# Altium PCB PCB_CAN2USB.PcbDoc
Units mm, origin at the board's own origin, x right, y up, seen from the top; angles counter-clockwise.
Board outline 25.4 x 99.06 mm, 2 copper layers (Top Layer, Bottom Layer); 26 components, 23 nets, 113 pads, 13 vias.
Unrouted connection lines stored in the file: 1.
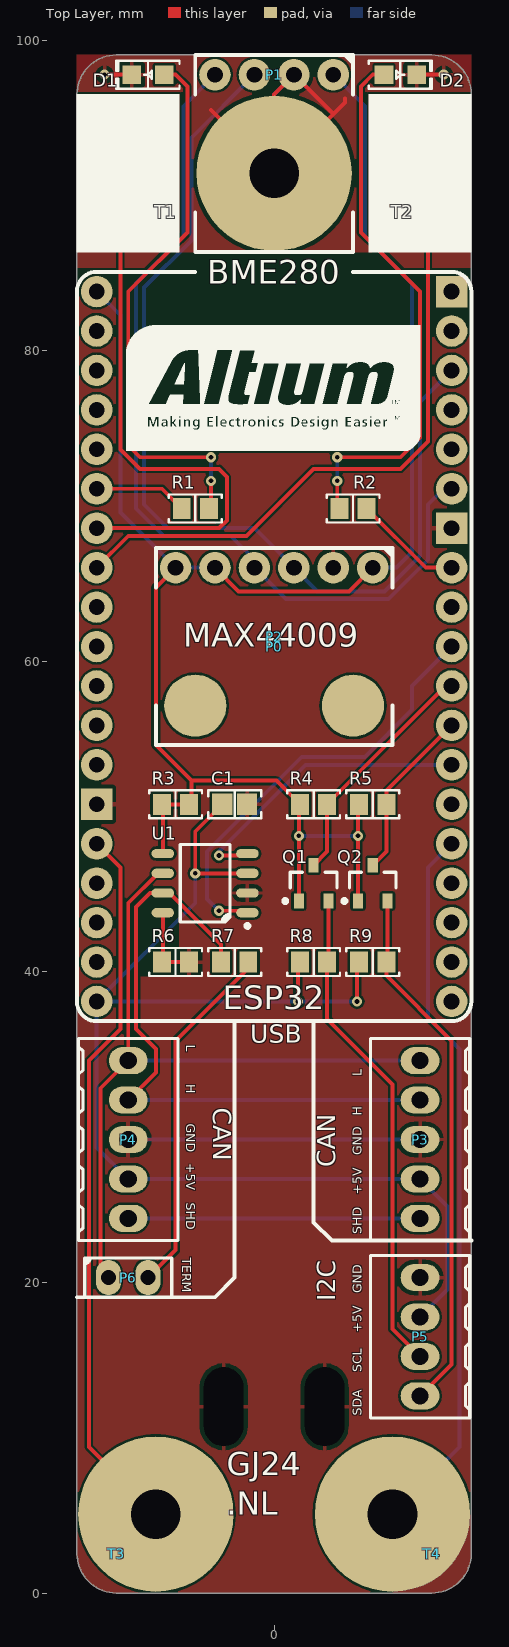
[diagram p0: Top Layer view]
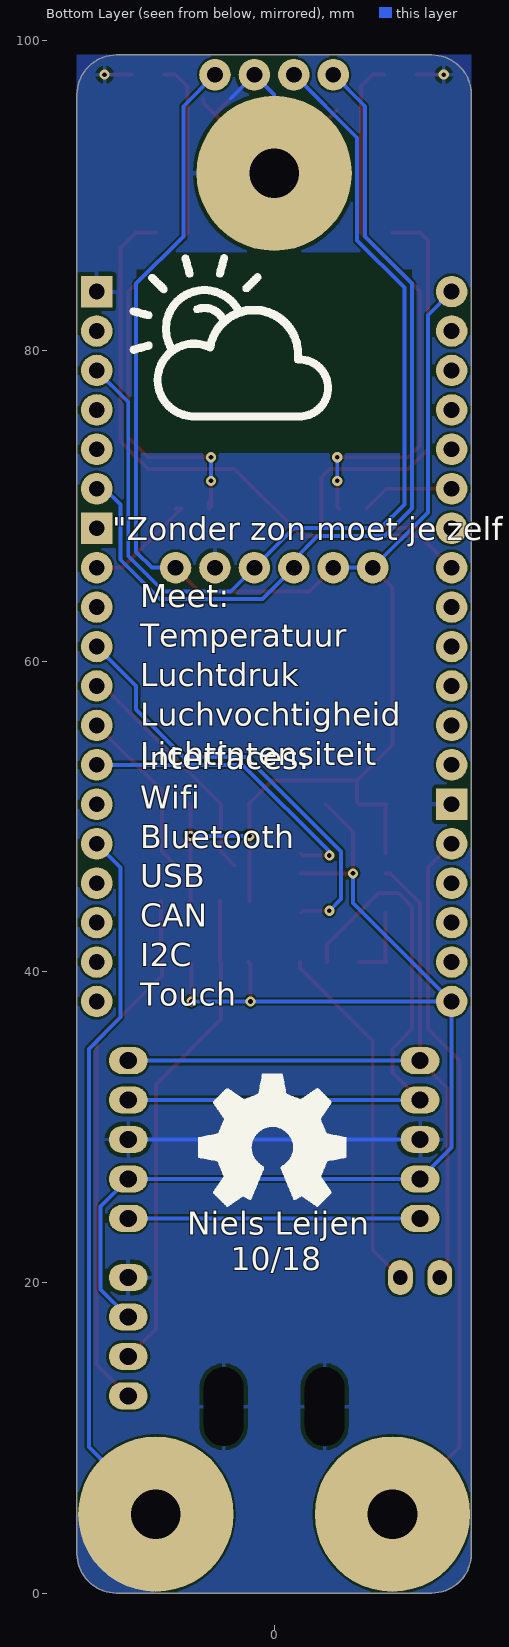
[diagram p1: Bottom Layer view, seen from below]
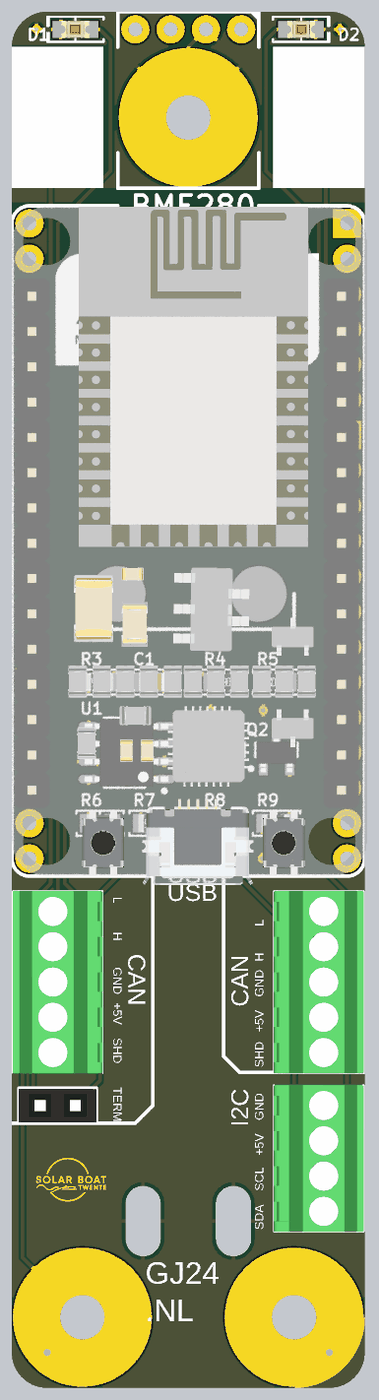
[diagram p2: 3D render of the assembled board from above, using the file's embedded part models]

## Layer stack, top to bottom
Top Solder: solder mask 0.0102, Solder Resist, Dk 3.5
Top Layer: signal copper 0.0356
Dielectric 1: dielectric 0.32, FR-4, Dk 4.8
Bottom Layer: signal copper 0.0356
Bottom Solder: solder mask 0.0102, Solder Resist, Dk 3.5

## Board outline
-12.7,2.54 -12.7,96.52 cw(c-10.16,96.52) -10.16,99.06 10.16,99.06 cw(c10.16,96.52) 12.7,96.52 12.7,2.54 cw(c10.16,2.54) 10.16,0 -10.16,0 cw(c-10.16,2.54)

## Design rules (kind name [scope] priority, off if disabled: settings)
Clearance [All] p1: gap=0.152 ignorepadtopadclearanceinfootprint=FALSE
PolygonConnect PolygonConnect_NOGND [not InNet('CAN_GND')] p1: connectstyle=Direct reliefconductorwidth=0.254 reliefentries=4 polygonreliefangle="90 Angle" airgapwidth=0.254
PolygonConnect [All] p2: connectstyle=Relief reliefconductorwidth=0.254 reliefentries=4 polygonreliefangle="90 Angle" airgapwidth=0.254
RoomDefinition Schematic_CAN2USB [InComponentClass('Schematic_CAN2USB')] p1: confinementstyle=ConfineIn formatcopy=TRUE lockcomponents=FALSE outline -18.75,-10.5 18.5,-10.5 18.5,107.5 -18.75,107.5
RoutingVias [All] p1: holewidth=0.711 width=1.27 viastyle="Through Hole" minholewidth=0.3 minwidth=0.6 maxholewidth=0.3 maxwidth=0.65
SolderMaskExpansion [All] p1: expansion=0.102
UnRoutedNet [All] p1: checkbadconnections=TRUE
Width [All] p1: maxlimit=0.254 minlimit=0.254 preferedwidth=0.254
29 further rules are at their usual default settings.

## Components (designator, comment, footprint, x,y, rotation, side; value= is the part's Value field where it differs from the comment)
C1 "Cap" "CAP 0805/2012" -2.54,50.8 r0 top value=100nF
D1 "Green" "LED 0805/2012 RED" -8.128,97.79 r180 top
D2 "Green" "LED 0805/2012 RED" 8.128,97.79 r0 top
P0 "NodeMCU_ESP32" NodeMCU 0,60.96 r0 top locked (schematic designator U1)
P1 "MAX44009" MAX44009_Breakout 0,99.06 r180 top (schematic designator P6)
P2 "BME280" BME280_Breakout 2.54,67.31 r180 top (schematic designator P5)
P3 "CAN2" "TE 282834-5" 9.398,29.21 r270 top (schematic designator P4)
P4 "CAN1" "TE 282834-5" -9.398,29.21 r90 top (schematic designator P3)
P5 "I2C" "TE 282834-4" 9.398,16.51 r270 top (schematic designator P1)
P6 "CAN Terminate" "SAMTEC SSW-102-03-T-S" -9.398,20.32 r0 top (schematic designator P2)
Q1 "BSS138" "DIODES SOT-23-3" 2.54,45.72 r90 top
Q2 "BSS138" "DIODES SOT-23-3" 6.35,45.72 r90 top
R1 "Res2" "RES 0805/2012" -5.08,69.85 r180 top value=220 (schematic designator R8)
R2 "Res2" "RES 0805/2012" 5.08,69.85 r0 top value=220 (schematic designator R9)
R3 "Res2" "RES 0805/2012" -6.35,50.8 r180 top value=0 (schematic designator R6)
R4 "Res2" "RES 0805/2012" 2.54,50.8 r180 top value=10K (schematic designator R1)
R5 "Res2" "RES 0805/2012" 6.35,50.8 r180 top value=10K (schematic designator R3)
R6 "Res2" "RES 0805/2012" -6.35,40.64 r0 top value=10K (schematic designator R5)
R7 "Res2" "RES 0805/2012" -2.54,40.64 r180 top value=120
R8 "Res2" "RES 0805/2012" 2.54,40.64 r180 top value=10K (schematic designator R2)
R9 "Res2" "RES 0805/2012" 6.35,40.64 r180 top value=10K (schematic designator R4)
T1 "Touch" Pad -7.62,87.63 r0 top (schematic designator T2)
T2 "Touch" Pad 7.62,87.63 r0 top (schematic designator T1)
T3 "Touch" Pad -10.16,2.54 r0 top
T4 "Touch" Pad 10.16,2.54 r0 top
U1 "CAN Tranceiver 5V/3.3V" "MICROCHIP SOIC-8 150mil Wide" -4.445,45.72 r180 top (schematic designator U2)

## Footprints (in the part's own frame and the unit in brackets; to place one, negate y for a bottom-side part, rotate by r counter-clockwise, add the part's x,y. Pads: shape width x height; smd on the part's side, far side on the other; paste and mask are expansions set on the pad)
BME280_Breakout [mil] "Bosch BME280 digital pressure sensor, humidity sensor, and temperature sensor"
  round 80 hole 40: 1(-150,50) 2(-50,50) 3(50,50) 4(150,50) 5(250,50) 6(350,50)
  round 157.48 smd: MH(-100,400) MH(300,400)
  silkscreen extent -200,0 400,500, body extent -200,0 400,500, height 79
"CAP 0805/2012" [mm] "Chip Capacitor, 2-Leads, Body 2.00x1.20mm, IPC Medium Density"
  rect 1.3x1.4 smd: 1(-0.8,0) 2(0.8,0)
  silkscreen extent -1.7,-0.9 1.7,0.9, body extent -1,-0.64 1,0.64, height 1.26
"DIODES SOT-23-3" [mm] "SOT23, 3-Leads, Body 2.90x2.40mm, Pitch 0.95mm, IPC Medium Density"
  rect 0.95x0.65 smd: 1(-1.15,0.95) 2(1.15,0) 3(-1.15,-0.95)
  silkscreen extent -1.27,-1.5 0.7,1.95, body extent -1.41,-1.45 1.41,1.45, height 1.5
"LED 0805/2012 RED" [mm] "Chip Diode, 2-Leads, Body 2.00x1.25mm, IPC Medium Density"
  rect 1.2x1.2 smd: 1(-1.05,0) 2(1.05,0)
  silkscreen extent -2.03,-0.9 2.03,0.9, body extent -1,-0.62 1,0.63, height 0.9
MAX44009_Breakout [mil]
  round 80 hole 40: 1(-150,50) 2(-50,50) 3(50,50) 4(150,50)
  silkscreen extent -200,0 200,500, body extent -200,0 200,500, height 79
"MICROCHIP SOIC-8 150mil Wide" [mm] "SOIC, 8-Leads, Body 4.90x3.90mm, Pitch 1.27mm, IPC Medium Density"
  oval 1.45x0.6 smd: 1(-2.725,1.905) 2(-2.725,0.635) 3(-2.725,-0.635) 4(-2.725,-1.905) 5(2.725,-1.905) 6(2.725,-0.635) 7(2.725,0.635) 8(2.725,1.905)
  silkscreen extent -2.85,-2.5 1.6,2.88, body extent -3.01,-2.45 3.01,2.45, height 1.5
NodeMCU [mil]
  round 80 hole 40: 1(-450,900) 2(-450,800) 3(-450,700) 4(-450,600) 5(-450,500) 6(-450,400) 7(-450,300) 8(-450,200) 9(-450,100) 10(-450,0) 11(-450,-100) 12(-450,-200) 13(-450,-300) 15(-450,-500) 16(-450,-600) 17(-450,-700) 18(-450,-800) 19(-450,-900) 20(450,-900) 21(450,-800) 22(450,-700) 23(450,-600) 24(450,-500) 25(450,-400) 26(450,-300) 27(450,-200) 28(450,-100) 29(450,0) 30(450,100) 31(450,200) 33(450,400) 34(450,500) 35(450,600) 36(450,700) 37(450,800)
  rect 80x80 hole 40: 14(-450,-400) 32(450,300) 38(450,900)
  silkscreen extent -500,-950 500,950, body extent -500,-975 506,947, height 311
Pad [mm]
  round 0.5 smd paste+0 mask+0: 1(0,0)
"RES 0805/2012" [mm] "Chip Resistor, 2-Leads, Body 2.00x1.25mm, IPC Medium Density"
  rect 1.15x1.35 smd: 1(-0.875,0) 2(0.875,0)
  silkscreen extent -1.7,-0.9 1.7,0.9, body extent -0.95,-0.62 1.05,0.63, height 0.6
"SAMTEC SSW-102-03-T-S" [mm]
  oval 1.6x2.25 hole 0.95: 1(-1.27,0) 2(1.27,0)
  silkscreen extent -2.8,-1.27 2.8,1.27, body extent -2.79,-1.21 2.79,1.21, height 8.51
"TE 282834-4" [mm]
  oval 1.75x2.5 hole 1.1: 1(-3.81,0) 2(-1.27,0) 3(1.27,0) 4(3.81,0)
  silkscreen extent -5.24,-3.2 5.24,3.2, body extent -5.31,-3.25 5.31,3.25, height 10
"TE 282834-5" [mm]
  oval 1.75x2.5 hole 1.1: 1(-5.08,0) 2(-2.54,0) 3(0,0) 4(2.54,0) 5(5.08,0)
  silkscreen extent -6.51,-3.2 6.51,3.2, body extent -6.58,-3.25 6.58,3.25, height 10

## Part data
C1: "Capacitor", LatestRevisionDate=17-Jul-2002, LatestRevisionNote="Re-released for DXP Platform.", PackageDescription="Radial Cap, Thru-Hole; 2 Leads; 0.3 in Pin Spacing", PackageReference=RAD-0.3, Published=8-Jun-2000, Publisher="Altium Limited"
D1 D2: library part LED, "Chip LED"
P1 P5: library part "Header 4", "Header, 4-Pin", LatestRevisionDate=17-Jul-2002, LatestRevisionNote="Re-released for DXP Platform.", Publisher="Altium Limited"
P2: library part "Header 6", "Header, 6-Pin", LatestRevisionDate=17-Jul-2002, LatestRevisionNote="Re-released for DXP Platform.", Publisher="Altium Limited"
P3 P4: library part "Header 5", "Header, 5-Pin", LatestRevisionDate=17-Jul-2002, LatestRevisionNote="Re-released for DXP Platform.", Publisher="Altium Limited"
P6: library part "Header 2", "Header, 2-Pin", LatestRevisionDate=17-Jul-2002, LatestRevisionNote="Re-released for DXP Platform.", Publisher="Altium Limited"
Q1 Q2: library part MOSFET-N, "N-Channel MOSFET", LatestRevisionDate=17-Jul-2002, LatestRevisionNote="Re-released for DXP Platform.", PackageDescription="TO, Flat Index; 3 In-Line, Axial Leads; Body Dia. 4.6mm; Lead Dia. 0.5 mm (max)", PackageReference=E3, PackageVersion=1995/1996, Published=8-Jun-2000, Publisher="Altium Limited"
R1 R2 R3 R4 R5 R6 R7 R8 R9: "Resistor", LatestRevisionDate=17-Jul-2002, LatestRevisionNote="Re-released for DXP Platform.", PackageDescription="Axial Device, Thru-Hole; 2 Leads; 0.4 in Pin Spacing", PackageReference=AXIAL-0.4, Published=8-Jun-2000, Publisher="Altium Limited"
T1 T2 T3 T4: library part Socket, "Socket", LatestRevisionDate=17-Jul-2002, LatestRevisionNote="Re-released for DXP Platform.", Publisher="Altium Limited"
U1: library part TLE6250G(V33)

## Free pads (board coordinates)
  round 10 hole 3.2: MH(-7.62,5.08) MH(0,91.44) MH(7.62,5.08)
  round 0 hole 2.54 slot 5.08 at 90 deg unplated: ""(-3.25,12) ""(3.25,12)

## Via types
v1: diameter 0.65, hole 0.3, Top Layer to Bottom Layer, 13 vias

## Nets (pads, with @x,y where several pads share a name; then routed paths per layer and width w, separated by ;. In a path a pad name is that pad's centre, name@x,y a point inside that pad or via, vN(x,y) a via of type N, cw(c..) or ccw(c..) an arc to the next point about the centre after c; other vN are vias at no path point)
+3V3: P0.1 P1.1 P2.1 P2.5 P2.6 Q1.1 Q2.1 R3.1 R3.2 R4.2 R5.2 U1.5 | length 115.3
  Top Layer w0.254: U1.5 -7.17,50.745 R3.2 R3.1 -5.334,50.941 -5.334,52.324 ; P2.6 -7.62,64.77 -7.62,54.61 -5.334,52.324 ; P2.5 -2.286,64.516 4.826,64.516 P2.1 ; Q1.1 v1(1.59,48.768) 1.59,50.725 R4.2 0.141,52.324 -5.334,52.324 ; Q2.1 v1(5.4,48.768) 5.4,50.725 R5.2
  Bottom Layer w0.254: P0.1 -9.906,82.296 -9.906,69.596 P2.6 P2.5 ; v1(1.59,48.768) v1(5.4,48.768) ; P1.1 5.842,95.758 5.842,87.376 8.89,84.328 8.89,67.056 7.874,66.04 P2.1
CAN_GND: C1.2 D1.2 D2.2 P0.14 P0.32 P0.38 P1.2 P2.2 P3.3 P4.3 P5.1 pad. pad.MH@0,91.44 R6.1 R6.2 U1.2 U1.8 | length 55
  Top Layer w0.254: v1(-10.922,97.79) D1.2 ; U1.8 -7.17,40.695 R6.1 R6.2 ; -4.064,95.504 0,91.44 4.572,96.012 4.572,96.266 ; pad.MH@0,95.504 0,96.52 P1.2 3.683,95.377 ; D2.2 v1(10.922,97.79)
  Bottom Layer w0.254: P4.3 P3.3 ; pad.MH@0,91.44 0,96.52 P1.2 2.794,96.266
CAN_H: P3.2 P4.4 R7.2 U1.7 | length 40.9
  Top Layer w0.254: P4.4 -7.62,33.528 -7.62,35.052 -8.89,36.322 -8.89,44.196 -8.001,45.085 U1.7 -6.731,45.085 -3.415,41.769 R7.2
  Bottom Layer w0.254: P4.4 P3.2
CAN_L: P3.1 P4.5 P6.1 U1.6 | length 46.9
  Top Layer w0.254: P6.1 -11.176,20.828 -11.176,32.512 P4.5 -9.398,44.45 -7.493,46.355 U1.6
  Bottom Layer w0.254: P4.5 P3.1
CAN_RXD: P0.26 U1.4 | length 19.4
  Top Layer w0.254: v1(-3.556,47.498) -1.847,47.498 U1.4
  Bottom Layer w0.254: v1(-3.556,47.498) -3.556,47.752 2.032,53.34 P0.26
CAN_SHLD: P3.5 P4.1 | length 18.8
  Bottom Layer w0.254: P4.1 P3.5
CAN_TXD: P0.29 U1.1 | length 28.5
  Top Layer w0.254: v1(-3.556,43.942) -1.847,43.942 U1.1 ; P0.29@11.176,61.384 P0.29@11.43,61.13
  Bottom Layer w0.254: v1(-3.556,43.942) -4.318,44.704 -4.318,47.752 1.778,53.848 5.842,53.848 8.89,56.896 8.89,58.42 P0.29
CAN_V+: C1.1 P0.19 P3.4 P4.2 P5.2 R8.2 R9.2 U1.3 | length 82.7
  Top Layer w0.254: C1.1 -5.08,49.06 v1(-5.08,46.355) U1.3 ; v1(1.524,38.1) 1.524,40.499 R8.2 ; v1(5.334,38.1) 5.334,40.499 R9.2
  Bottom Layer w0.254: v1@-5.08,46.228 -5.08,44.45 P0.19 ; v1(5.334,38.1) P0.19 ; P5.2 11.176,19.558 11.176,24.892 P3.4 P4.2 -11.43,28.702 P0.19
LED1: P0.6 R1.2 | length 6
  Top Layer w0.254: P0.6 -7.225,71.12 R1.2
LED2: P0.31 R2.2 | length 7.4
  Top Layer w0.254: R2.2@6.35,69.85 R2.2 9.765,66.04 P0.31
NetD1_1: D1.1 R1.1 | length 35.5
  Top Layer w0.254: D1.1 -6.35,97.79 -5.588,97.028 -5.588,87.63 -9.398,83.82 -9.398,73.914 -8.636,73.152 v1(-4.064,73.152) ; R1.1 -4.064,69.991 v1(-4.064,71.628)
  Bottom Layer w0.254: v1(-4.064,71.628) v1(-4.064,73.152)
NetD2_1: D2.1 R2.1 | length 35.6
  Top Layer w0.254: v1(4.064,71.628) 4.064,69.991 R2.1 R2.1@4.205,70.245 ; v1(4.064,73.152) 8.128,73.152 9.398,74.422 9.398,83.82 5.588,87.63 5.588,97.028 6.35,97.79 D2.1
  Bottom Layer w0.254: v1(4.064,71.628) v1(4.064,73.152)
NetP5_3: P5.3 Q1.3 R8.1 | length 31.8
  Top Layer w0.254: Q1.3 3.49,40.715 R8.1 3.415,36.971 7.62,32.766 7.62,17.018 P5.3
NetP5_4: P5.4 Q2.3 R9.1 | length 34.5
  Top Layer w0.254: Q2.3 7.3,40.715 R9.1 7.225,39.765 11.43,35.56 11.43,14.732 P5.4
NetP6_2: P6.2 R7.1 | length 23
  Top Layer w0.254: P6.2 -6.35,22.098 -6.35,35.56 -1.665,40.245 R7.1
SCL0: P0.36 P1.3 P2.3 | length 64.5
  Bottom Layer w0.254: P1.3 -5.334,93.726 -5.334,87.122 -8.382,84.074 -8.382,70.104 -6.858,68.58 -1.27,68.58 P2.3 2.794,64.516 7.112,64.516 9.398,66.802 9.398,76.708 P0.36
SCL1: P0.28 Q1.2 R4.1 | length 15.5
  Top Layer w0.254: Q1.2 3.415,47.745 R4.1 11.035,58.42 P0.28
SDA0: P0.33 P1.4 P2.4 | length 58.1
  Bottom Layer w0.254: P1.4 -5.842,95.758 -5.842,87.376 -8.89,84.328 -8.89,69.85 -7.112,68.072 -2.794,68.072 -1.27,66.548 P2.4 0.762,64.008 7.366,64.008 9.906,66.548 9.906,70.104 10.922,71.12 P0.33
SDA1: P0.27 Q2.2 R5.1 | length 11.1
  Top Layer w0.254: Q2.2 7.225,47.745 R5.1 7.225,51.675 P0.27
TOUCH1: P0.7 T1.1 | length 34.9
  Top Layer w0.254: P0.7 -3.556,68.58 -3.048,69.088 -3.048,71.882 -3.556,72.39 -8.636,72.39 -9.906,73.66 -9.906,87.122 -9.398,87.63 T1.1
TOUCH2: P0.8 T2.1 | length 39.9
  Top Layer w0.254: P0.8 -9.398,68.072 -1.778,68.072 2.54,72.39 8.128,72.39 9.906,74.168 9.906,86.614 8.89,87.63 T2.1
TOUCH3: P0.15 T3.1 | length 46.4
  Top Layer w0.254: P0.15 -9.906,46.736 -9.906,36.322 -11.938,34.29 -11.938,9.398 -7.62,5.08
TOUCH4: P0.24 pad.MH@7.62,5.08 T4.1 | length 46.4
  Bottom Layer w0.254: pad.MH@7.62,5.08 11.938,9.398 11.938,35.052 9.906,37.084 9.906,46.736 P0.24
pads on no net: P0.2 P0.3 P0.4 P0.5 P0.9 P0.10 P0.11 P0.12 P0.13 P0.16 P0.17 P0.18 P0.20 P0.21 P0.22 P0.23 P0.25 P0.30 P0.34 P0.35 P0.37 P2.MH

## Polygon pours and split planes (outlines as drawn)
no net on Top Layer "NONET_L01_P012" (solid, pour order 12): -7.62,0 -12.7,5.08 -12.7,2.54 ccw(c-10.16,2.54) -10.16,0
TOUCH4 on Top Layer "TOUCH4_L01_P016" (solid, pour order 16): 7.62,0 12.7,5.08 12.7,2.54 cw(c10.16,2.54) 10.16,0
no net on Top Layer "NONET_L01_P013" (solid, pour order 13): 6.096,96.52 12.7,96.52 12.7,85.344 8.382,85.344 6.096,87.63
no net on Top Layer "NONET_L01_P017" (solid, pour order 17): -6.096,96.52 -12.7,96.52 -12.7,85.344 -8.382,85.344 -6.096,87.63
CAN_GND on Top Layer "CAN_GND_L01_P019" (solid, pour order 19): -12.7,85.26 -9.398,85.26 -9.398,73.406 9.398,73.406 9.398,85.26 12.7,85.26 12.7,0 -12.7,0
CAN_GND on Top Layer "CAN_GND_L01_P018" (solid, pour order 18): -12.7,85.26 -12.7,99.06 12.7,99.06 12.7,85.26 7.874,85.26 6.813,86.36 -6.813,86.36 -7.874,85.26
CAN_GND on Bottom Layer "CAN_GND_L02_P021" (solid, pour order 21): -12.7,85.26 -8.89,85.26 -8.89,73.406 8.89,73.406 8.89,85.26 12.7,85.26 12.7,0 -12.7,0
CAN_GND on Bottom Layer "CAN_GND_L02_P020" (solid, pour order 20): -12.7,85.26 -12.7,99.06 12.7,99.06 12.7,85.26 8.128,85.26 6.949,86.36 -6.695,86.36 -7.874,85.26
TOUCH4 on Bottom Layer "TOUCH4_L02_P015" (solid, pour order 15): 7.62,0 12.7,5.08 12.7,2.54 cw(c10.16,2.54) 10.16,0
no net on Bottom Layer "NONET_L02_P014" (solid, pour order 14): -7.62,0 -12.7,5.08 -12.7,2.54 ccw(c-10.16,2.54) -10.16,0
no net on Top Overlay "NONET_L-01_P-001" (solid, pour order 23): -6.096,96.52 -12.7,96.52 -12.7,86.36 -6.096,86.36
no net on Top Overlay "NONET_L-01_P-001" (solid, pour order 22): 6.096,86.36 12.7,86.36 12.7,96.52 6.096,96.52

## Other copper
Top Layer:
  pour cut-out: -8.89,39.706 -6.096,39.706 -6.096,44.45 -6.731,45.085 -8.001,45.085 -8.89,44.196

## Silkscreen, mask and mechanical layers (free items; w line width, h text height)
Top Overlay:
  drawing of 1847 lines, arcs and shapes, not listed
  text "BME280" at -4.318,84.328 h1.52
  text "MAX44009" at -5.842,60.96 h1.52
  text "ESP32" at -3.302,37.592 h1.52
  text "L" at -5.842,35.306 h1 r270
  text "USB" at -1.524,35.052 h2
  text "L" at 5.842,33.274 h1 r90
  text "H" at -5.842,32.766 h1 r270
  text "CAN" at -4.318,31.242 h2 r270
  text "H" at 5.842,30.734 h1 r90
  text "GND" at -5.842,30.226 h1 r270
  text "GND" at 5.842,28.194 h1 r90
  text "+5V" at -5.842,27.686 h1 r270
  text "CAN" at 4.318,27.432 h2 r90
  text "+5V" at 5.842,25.654 h1 r90
  text "SHD" at -5.842,25.146 h1 r270
  text "SHD" at 5.842,23.114 h1 r90
  text "TERM" at -6.096,21.59 h1 r270
  text "GND" at 5.842,19.304 h1 r90
  text "I2C" at 4.318,18.796 h2 r90
  text "+5V" at 5.842,16.764 h1 r90
  text "SCL" at 5.842,14.224 h1 r90
  text "SDA" at 5.842,11.43 h1 r90
  text "GJ24 / .NL" at -3.048,4.572 h2.54
Bottom Overlay:
  drawing of 1651 lines, arcs and shapes, not listed
  text "\"Zonder zon moet je zelf gaan schijnen\"" at 10.414,67.31 h2.54
  text "Meet: / Temperatuur / Luchtdruk / Luchvochtigheid / Lichtintensiteit" at 8.636,52.832 h2.54
  text "Interfaces: / Wifi / Bluetooth / USB / CAN / I2C / Touch" at 8.636,37.338 h2.54
  text "Niels Leijen" at 5.588,22.606 h2.54
  text "10/18" at 2.794,20.32 h2.54
Top Solder:
  drawing of 5409 lines, arcs and shapes, not listed
Mechanical 1:
  the board outline again, w0.254